# Altium PCB CH32V307V-R0-1v0.PcbDoc (part 1 of 3)
Units mil, origin at the board's own origin, x right, y up, seen from the top; angles counter-clockwise.
Board outline 3661.42 x 3267.72 mil, 2 copper layers (Top Layer, Bottom Layer); 68 components, 119 nets, 417 pads, 746 vias.
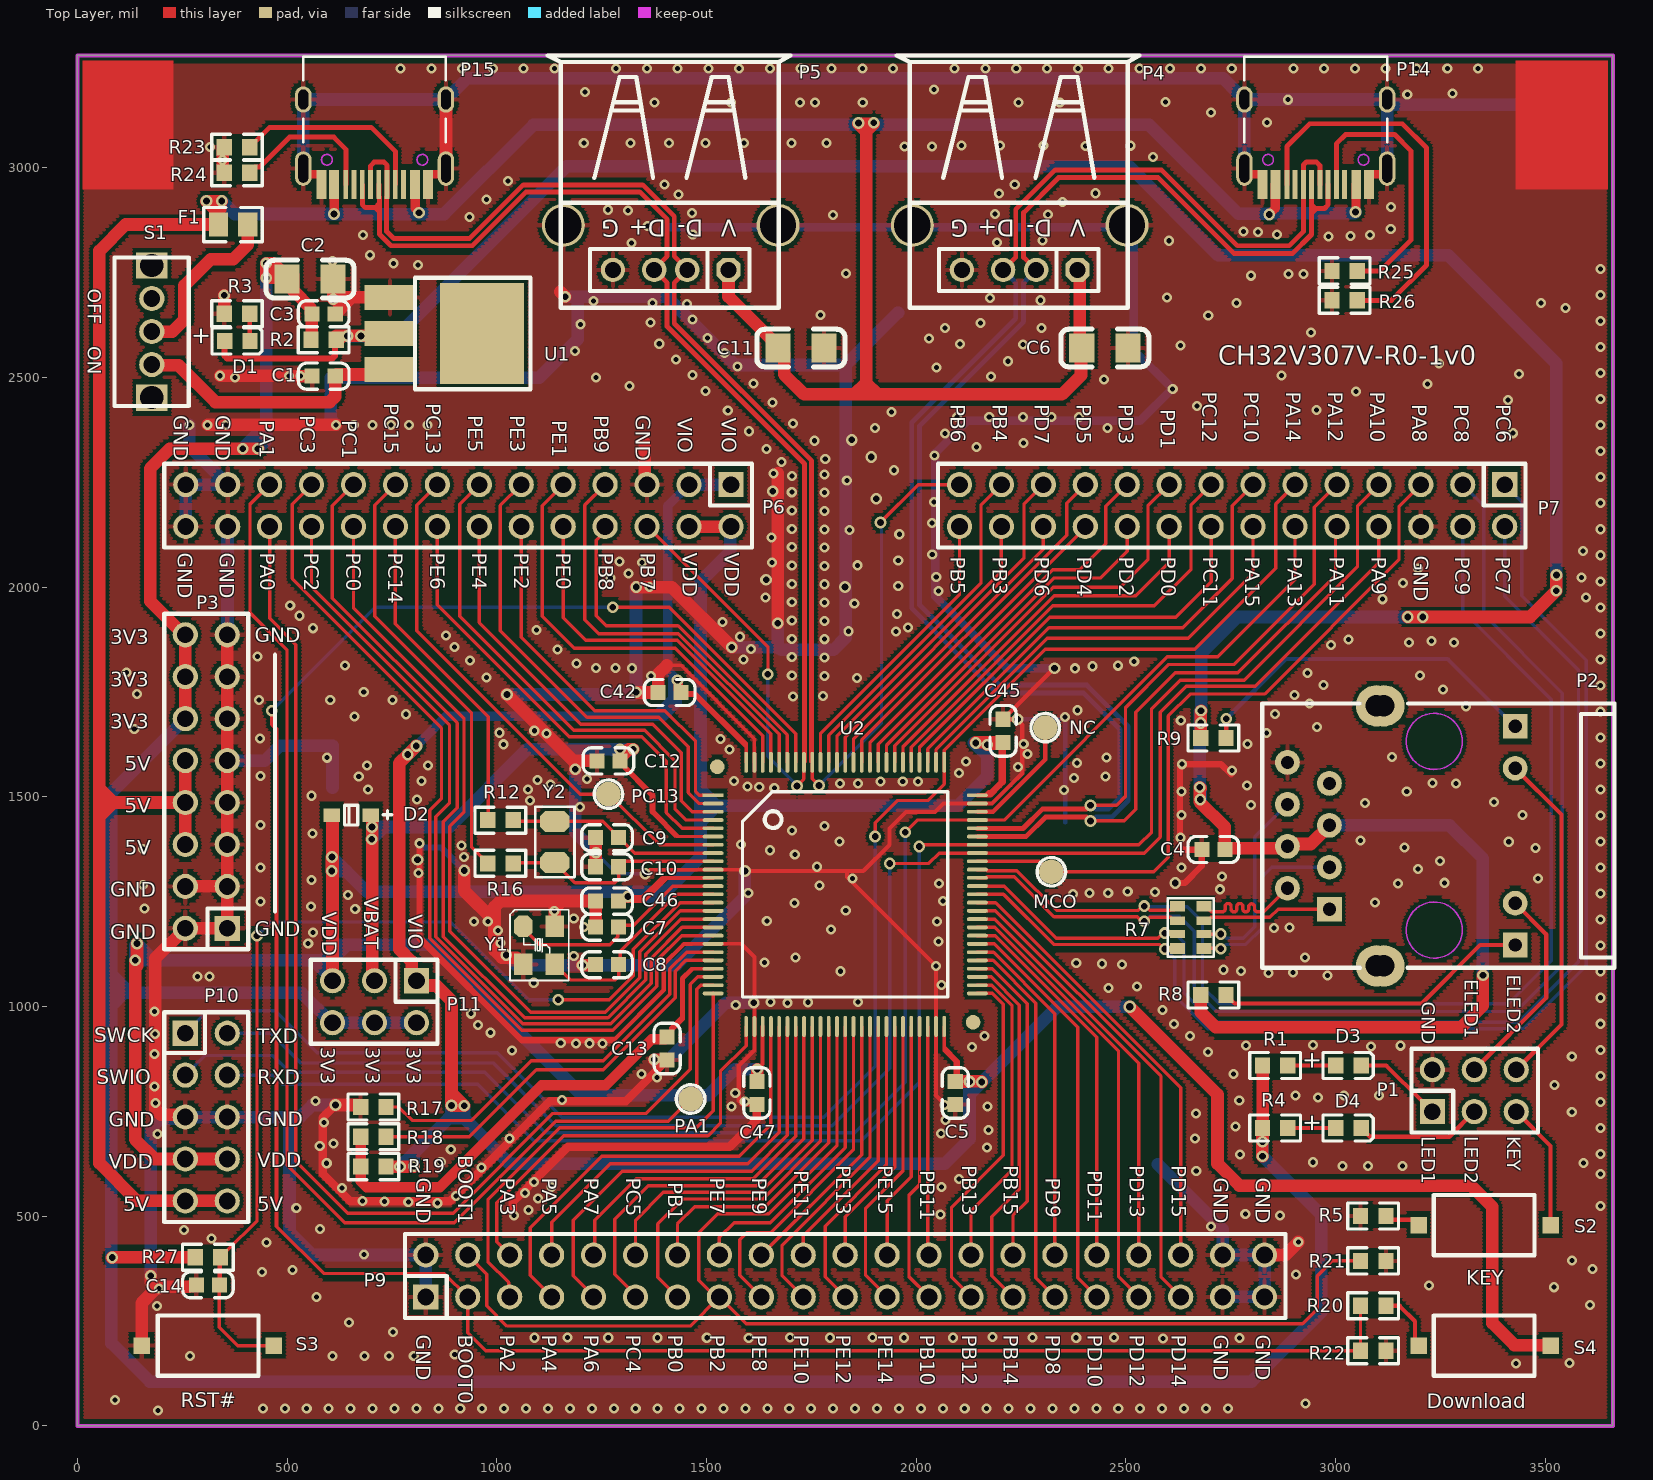
[diagram p0: Top Layer view]
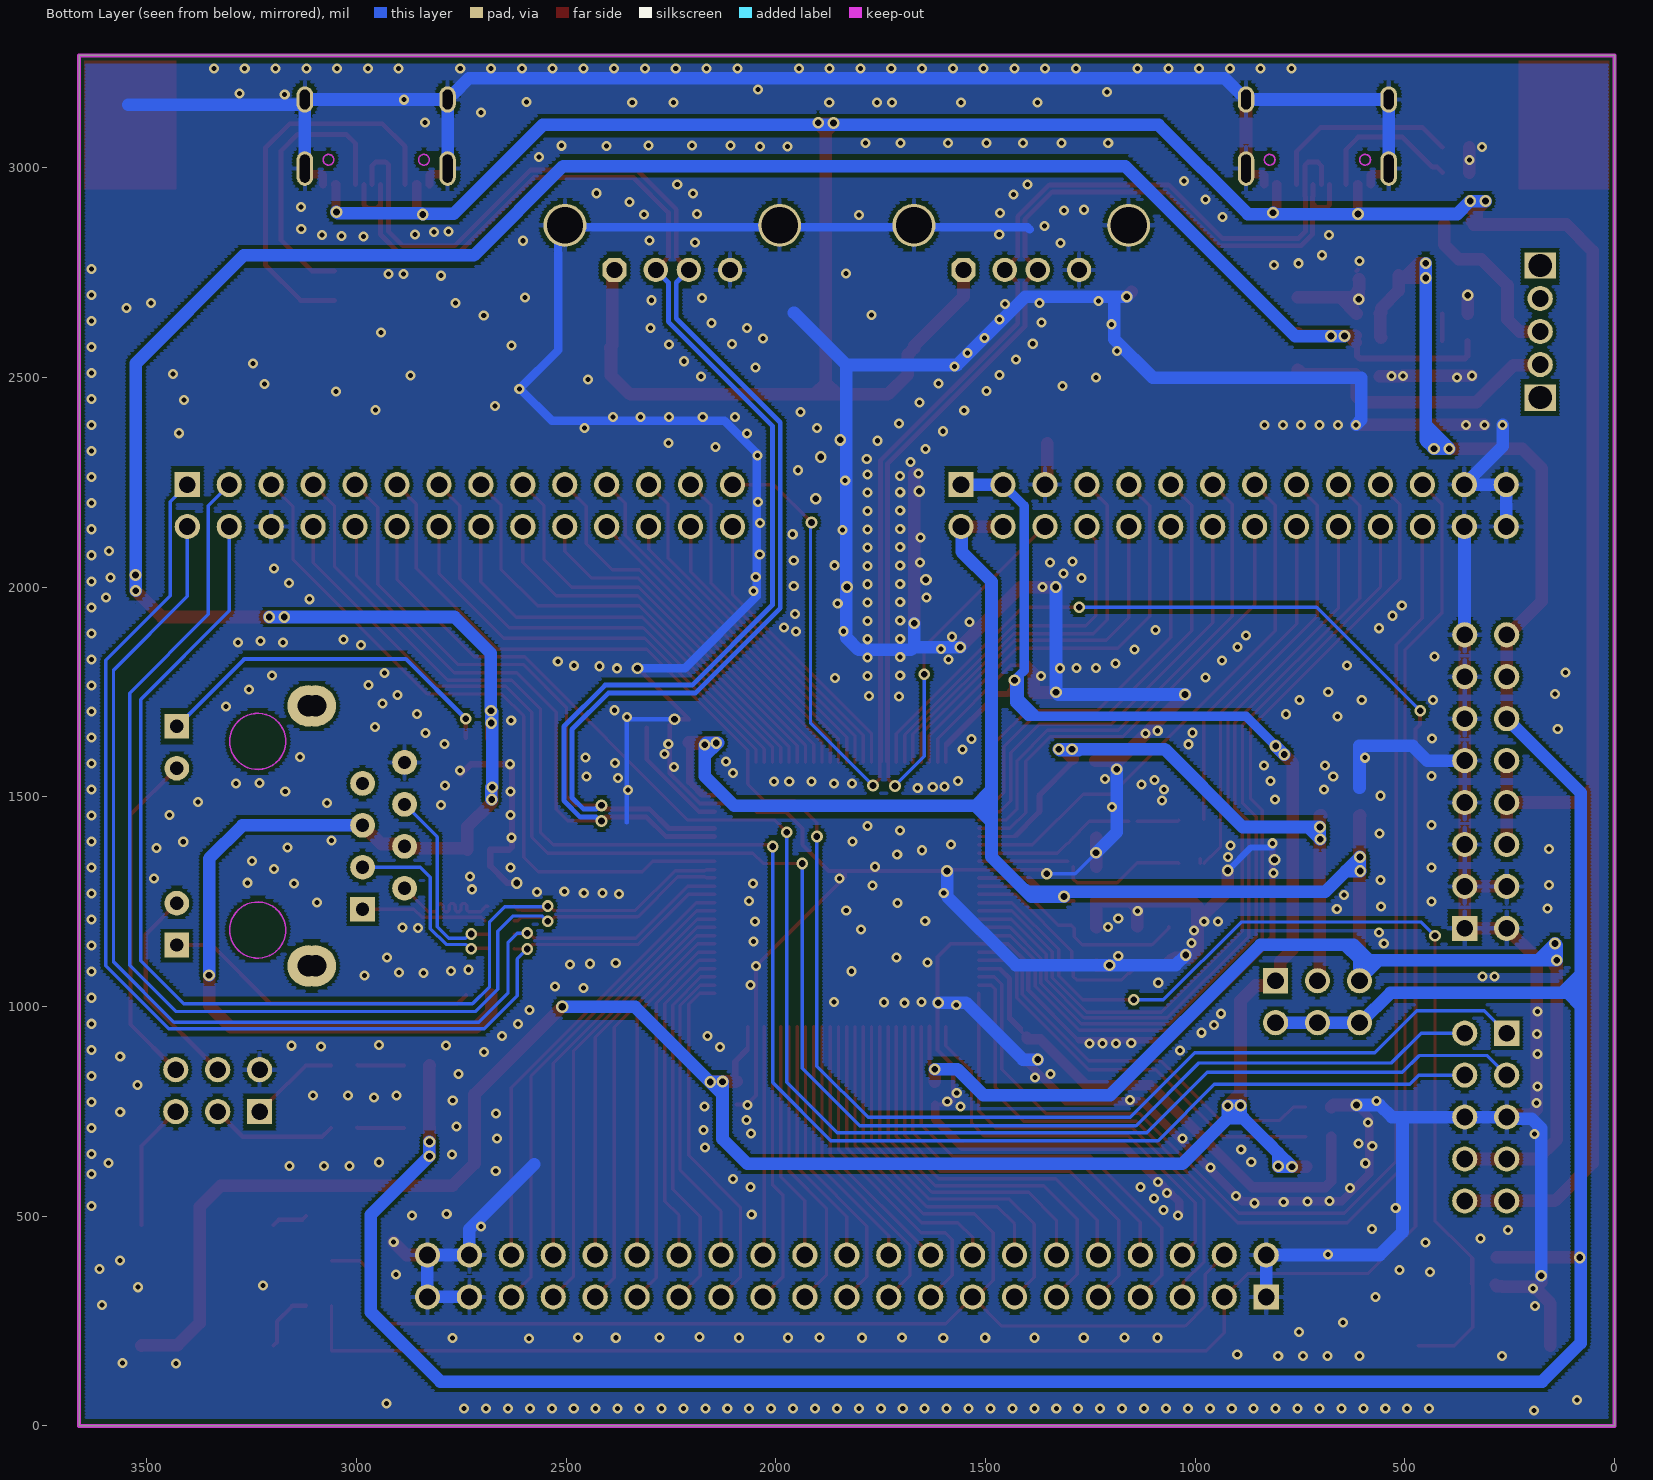
[diagram p1: Bottom Layer view, seen from below]

## Layer stack, top to bottom
Top Solder: solder mask 0.4, Solder Resist, Dk 3.5
Top Layer: signal copper 1.4
Dielectric 1: dielectric 12.6, FR-4, Dk 4.8
Bottom Layer: signal copper 1.4
Bottom Solder: solder mask 0.4, Solder Resist, Dk 3.5

## Board outline
0,0 0,3267.72 3661.42,3267.72 3661.42,0

## Design rules (kind name [scope] priority, off if disabled: settings)
Clearance Clearance_1 [InPolygon] p1: gap=8 ignorepadtopadclearanceinfootprint=FALSE
Clearance [All] p2: gap=5 ignorepadtopadclearanceinfootprint=FALSE
ComponentClearance [All] p1 off: gap=10 collisioncheckmode=3 verticalgap=10 showdistances=FALSE
DiffPairsRouting [All] p1: maxlimit=10 minlimit=5 mostfreqgap=7 toplayer_minwidth=8 toplayer_maxwidth=15 toplayer_prefwidth=8 bottomlayer_minwidth=8 bottomlayer_maxwidth=15 bottomlayer_prefwidth=8 maxuncoupledlength=500
MinimumSolderMaskSliver [All] p1 off: minsoldermaskwidth=10
PolygonConnect PolygonConnect_1 [IsVia] p1: connectstyle=Direct reliefconductorwidth=10 reliefentries=4 polygonreliefangle="90 Angle" airgapwidth=10
PolygonConnect [All] p2: connectstyle=Relief reliefconductorwidth=10 reliefentries=4 polygonreliefangle="90 Angle" airgapwidth=10
RoutingVias [All] p1: holewidth=16 width=28 viastyle="Through Hole" minholewidth=12 minwidth=24 maxholewidth=28 maxwidth=50
SilkToSilkClearance [All] p1 off: silktosilkclearance=10
SilkToSolderMaskClearance [IsPad] p1 off: minsilkscreentomaskgap=10 clearancetoexposedcopper=TRUE
SolderMaskExpansion [All] p1: expansion=4 istentingtop=FALSE
Width [All] p1: maxlimit=100 minlimit=6 preferedwidth=10
25 further rules are at their usual default settings.

## Classes and differential pairs
differential pair ETX: +ETXP -ETXN
differential pair ERX: +ERXP -ERXN
differential pair ERX1: +ERXP1 -ERXN1
differential pair USB1: +PB7 -PB6
differential pair USB2: +PA12 -PA11

## Components (designator, comment, footprint, x,y, rotation, side; value= is the part's Value field where it differs from the comment)
C1 "0.1uF" 0603_C 614.71,2503.21 r180 top
C2 "10uF" 3216_C 499.71,2734.59 r180 top
C3 "0.1uF" 0603_C 559.72,2651.67 r0 top
C4 "1uF" 0603_C 2681.03,1374.36 r0 top
C5 "0.1uF" 0603_C 2093.21,821.36 r270 top
C6 "10uF" 3216_C 2394.73,2570.1 r180 top
C7 "20pF" 0603_C 1235.4,1189.11 r0 top
C8 "20pF" 0603_C 1235.4,1099.73 r0 top
C9 "12pF" 0603_C 1235.4,1402.61 r0 top
C10 "12pF" 0603_C 1235.4,1333.23 r0 top
C11 "10uF" 3216_C 1670.08,2570.1 r180 top
C12 "0.1uF" 0603_C 1238.69,1585.69 r0 top
C13 "0.1uF" 0603_C 1406.03,927.4 r270 top
C14 "0.1uF" 0603_C 283.44,336.36 r0 top
C42 "0.1uF" 0603_C 1384.49,1748.68 r0 top
C45 "0.1uF" 0603_C 2207.3,1629.96 r90 top
C46 "0.1uF" 0603_C 1290.39,1251.48 r180 top
C47 "0.1uF" 0603_C 1620.21,766.37 r90 top
D1 "RED" 0603+ 350.83,2586.93 r0 top
D2 "B0520WS" SOD-323 699.12,1456.36 r180 top
D3 "BLUE" 0603+ 3000.21,859.36 r0 top
D4 "RED" 0603+ 3000.21,710.36 r0 top
F1 "500mA" 0805 336.17,2864.6 r0 top
MCO "Testpoint" TESTPOINT1 2322.21,1321.36 r0 top
NC "Testpoint" TESTPOINT1 2307.69,1664.95 r0 top
P1 "IO" IDC6-2.54mm 3230.77,749.27 r0 top
P2 "HR911105A" HR911105A 2985.22,1231.99 r90 top
P3 "Ppin" IDC16-2.54mm 357.21,1186.36 r180 top
P4 "USBFS" USBAF 2384.59,2756.36 r180 top
P5 "USBHS" USBAF 1552.42,2756.36 r180 top
P6 "HEADER 14x2" IDC28-2.54MM 1558.21,2244.36 r270 top
P7 "HEADER 14x2" IDC28-2.54MM 3403.21,2244.36 r270 top
P9 "HEADER 21x2" IDC42-2.54MM 830.71,307.44 r90 top
P10 "LINK" IDC10-2.54mm 257.21,536.36 r0 top
P11 "Psel" IDC6-2.54mm 808.21,1061.36 r180 top
P14 "USBFS" TYPE-C-Receptacle-2.0 2952.78,2959.96 r180 top
P15 "USBHS" TYPE-C-Receptacle-2.0 708.64,2959.96 r180 top
PA1 "Testpoint" TESTPOINT1 1462.18,779.41 r0 top
PC13 "Testpoint" TESTPOINT1 1266.21,1506.36 r0 top
R1 "1K" 0603 2825.58,859.36 r0 top
R2 "0R" 0603 556.9,2589.82 r0 top
R3 "1K" 0603 410.77,2651.66 r180 top
R4 "1K" 0603 2825.58,710.36 r0 top
R5 "10K" 0603 3059.47,500.58 r0 top
R7 "0Ω" RCA-8P4R-0603 2654.91,1188.5 r270 top
R8 "1K" 0603 2678.21,1027.36 r0 top
R9 "1K" 0603 2678.21,1640.36 r0 top
R12 "NC(0R)" 0603 978.21,1444.36 r0 top
R16 "NC(0R)" 0603 978.21,1341.36 r0 top
R17 "0R" 0603 675.15,760.26 r0 top
R18 "0R" 0603 675.15,689.26 r0 top
R19 "0R" 0603 735.78,618.26 r180 top
R20 "1K" 0603 3059.47,286.28 r0 top value=10K
R21 "10K" 0603 3059.47,393.43 r0 top
R22 "10K" 0603 3059.47,179.13 r0 top
R23 "5.1K" 0603 410.77,3048.82 r180 top
R24 "5.1K" 0603 410.77,2988 r180 top
R25 "5.1K" 0603 3051.97,2754.06 r180 top
R26 "5.1K" 0603 3051.97,2683.9 r180 top
R27 "10K" 0603 341.25,402.06 r180 top
S1 "SW SPDT" KEY_B 177.31,2451.87 r90 top
S2 "KEY" SMD_6.1x3.65x2.5mm-KEY 3512.71,478.75 r180 top
S3 "RST#" SMD_6.1x3.65x2.5mm-KEY 153.21,191.36 r0 top
S4 "Download" SMD_6.1x3.65x2.5mm-KEY 3512.71,191.36 r180 top
U1 "1117-3.3V" SOT-223 744.97,2690.71 r270 top
U2 "CH32V307V" LQFP100 1515.75,1503.62 r270 top
Y1 "8MHz" XT3225 1063.21,1190.91 r270 top
Y2 "32768Hz" FC-135 1138.21,1441.36 r270 top

## Footprints (in the part's own frame and the unit in brackets; to place one, negate y for a bottom-side part, rotate by r counter-clockwise, add the part's x,y. Pads: shape width x height; smd on the part's side, far side on the other; paste and mask are expansions set on the pad)
0603 [mm]
  rect 0.93x0.98 smd: 1(0,0) 2(1.54,0)
  silkscreen extent -0.76,-0.79 2.3,0.79
0603+ [mm]
  rect 0.93x0.98 smd: 1(0,0) 2(1.54,0)
  silkscreen extent -0.76,-0.79 2.27,0.79
0603_C [mil]
  rect 36x36 smd: 1(0,0) 2(55,0)
  silkscreen extent -33,-31 88,31
0805 [mm]
  rect 1.16x1.47 smd: 1(0,0) 2(1.78,0)
  silkscreen extent -0.88,-1.04 2.66,1.03
3216_C [mil]
  rect 60x70 smd: 1(0,0) 2(-110,0)
  silkscreen extent -160,-45 50,45
FC-135 [mil]
  oct 50x70 smd: 1(0,0) 2(98.43,0)
  silkscreen extent -35,-47 133,47
HR911105A [mm]
  rect 1.5x1.5 hole 0.8: 1(0,0) 9(-2.175,-11.252) 12(11.075,-11.252)
  round 1.5 hole 0.8: 2(1.27,2.54) 3(2.54,0) 4(3.81,2.54) 5(5.08,0) 6(6.35,2.54) 7(7.62,0) 8(8.89,2.54) 10(0.365,-11.252) 11(8.535,-11.252)
  round 2.5 hole 1.3: ""(-3.43,-2.852) ""(-3.43,-3.3) ""(12.32,-3.3) ""(12.32,-2.852)
  Keep-Out Layer circle w0.1: c10.165,-6.352 r1.7
  Keep-Out Layer circle w0.1: c-1.265,-6.352 r1.7
  silkscreen extent -3.55,-17.27 12.45,4.06
IDC6-2.54mm [mil]
  rect 60x60 hole 40: 1(0,0)
  round 60 hole 40: 2(0,100) 3(100,0) 4(100,100) 5(200,0) 6(200,100)
  silkscreen extent -50,-50 252,150
IDC10-2.54mm [mil]
  rect 60x60 hole 40: 1(0,400)
  round 60 hole 40: 2(100,400) 3(0,300) 4(100,300) 5(0,200) 6(100,200) 7(0,100) 8(100,100) 9(0,0) 10(100,0)
  silkscreen extent -50,-50 150,450
IDC16-2.54mm [mil]
  rect 60x60 hole 40: 1(0,0)
  round 60 hole 40: 2(100,0) 3(0,-100) 4(100,-100) 5(0,-200) 6(100,-200) 7(0,-300) 8(100,-300) 9(0,-400) 10(100,-400) 11(0,-500) 12(100,-500) 13(0,-600) 14(100,-600) 15(0,-700) 16(100,-700)
  silkscreen extent -50,-750 150,50
IDC28-2.54MM [mil]
  rect 60x60 hole 40: 1(0,0)
  round 60 hole 40: 2(100,0) 3(0,-100) 4(100,-100) 5(0,-200) 6(100,-200) 7(0,-300) 8(100,-300) 9(0,-400) 10(100,-400) 11(0,-500) 12(100,-500) 13(0,-600) 14(100,-600) 15(0,-700) 16(100,-700) 17(0,-800) 18(100,-800) 19(0,-900) 20(100,-900) 21(0,-1000) 22(100,-1000) 23(0,-1100) 24(100,-1100) 25(0,-1200) 26(100,-1200) 27(0,-1300) 28(100,-1300)
  silkscreen extent -50,-1351 150,50
IDC42-2.54MM [mil]
  rect 60x60 hole 40: 1(0,0)
  round 60 hole 40: 2(100,0) 3(0,-100) 4(100,-100) 5(0,-200) 6(100,-200) 7(0,-300) 8(100,-300) 9(0,-400) 10(100,-400) 11(0,-500) 12(100,-500) 13(0,-600) 14(100,-600) 15(0,-700) 16(100,-700) 17(0,-800) 18(100,-800) 19(0,-900) 20(100,-900) 21(0,-1000) 22(100,-1000) 23(0,-1100) 24(100,-1100) 25(0,-1200) 26(100,-1200) 27(0,-1300) 28(100,-1300) 29(0,-1400) 30(100,-1400) 31(0,-1500) 32(100,-1500) 33(0,-1600) 34(100,-1600) 35(0,-1700) 36(100,-1700) 37(0,-1800) 38(100,-1800) 39(0,-1900) 40(100,-1900) 41(0,-2000) 42(100,-2000)
  silkscreen extent -50,-2050 150,50
KEY_B [mm]
  rect 1.6x1.9 hole 1.4: 0(0,0) 0(8,0)
  round 1.524 hole 1.016: 1(4,0) 2(2,0) 3(6,0)
  silkscreen extent -0.52,-2.24 8.48,2.26
LQFP100 [mil]
  round 35 smd: 0(-68,10) 0(541.18,620)
  rect 9x50 smd: 1(0,0)
  oval 9x50 smd: 2(19.68,0) 3(39.37,0) 4(59.05,0) 5(78.74,0) 6(98.42,0) 7(118.11,0) 8(137.79,0) 9(157.48,0) 10(177.16,0) 11(196.85,0) 12(216.53,0) 13(236.22,0) 14(255.9,0) 15(275.59,0) 16(295.27,0) 17(314.96,0) 18(334.64,0) 19(354.33,0) 20(374.01,0) 21(393.7,0) 22(413.38,0) 23(433.07,0) 24(452.75,0) 25(472.44,0) 51(472.44,629.92) 52(452.75,629.92) 53(433.07,629.92) 54(413.38,629.92) 55(393.7,629.92) 56(374.01,629.92) 57(354.33,629.92) 58(334.64,629.92) 59(314.96,629.92) 60(295.27,629.92) 61(275.59,629.92) 62(255.9,629.92) 63(236.22,629.92) 64(216.53,629.92) 65(196.85,629.92) 66(177.16,629.92) 67(157.48,629.92) 68(137.79,629.92) 69(118.11,629.92) 70(98.42,629.92) 71(78.74,629.92) 72(59.05,629.92) 73(39.37,629.92) 74(19.68,629.92) 75(0,629.92)
  oval 50x9 smd: 26(551.18,78.74) 27(551.18,98.43) 28(551.18,118.11) 29(551.18,137.8) 30(551.18,157.48) 31(551.18,177.17) 32(551.18,196.85) 33(551.18,216.54) 34(551.18,236.22) 35(551.18,255.91) 36(551.18,275.59) 37(551.18,295.28) 38(551.18,314.96) 39(551.18,334.65) 40(551.18,354.33) 41(551.18,374.02) 42(551.18,393.7) 43(551.18,413.39) 44(551.18,433.07) 45(551.18,452.76) 46(551.18,472.44) 47(551.18,492.13) 48(551.18,511.81) 49(551.18,531.5) 50(551.18,551.18) 76(-78.74,551.18) 77(-78.74,531.5) 78(-78.74,511.81) 79(-78.74,492.13) 80(-78.74,472.44) 81(-78.74,452.76) 82(-78.74,433.07) 83(-78.74,413.39) 84(-78.74,393.7) 85(-78.74,374.02) 86(-78.74,354.33) 87(-78.74,334.65) 88(-78.74,314.96) 89(-78.74,295.28) 90(-78.74,275.59) 91(-78.74,255.91) 92(-78.74,236.22) 93(-78.74,216.54) 94(-78.74,196.85) 95(-78.74,177.17) 96(-78.74,157.48) 97(-78.74,137.8) 98(-78.74,118.11) 99(-78.74,98.43) 100(-78.74,78.74)
  silkscreen extent -8,70 481,560
RCA-8P4R-0603 [mm]
  rect 0.65x0.9 smd: 1(-1.28,-0.8) 4(1.28,-0.8) 5(1.28,0.8) 8(-1.28,0.8)
  rect 0.5x0.9 smd: 2(-0.4,-0.8) 3(0.4,-0.8) 6(0.4,0.8) 7(-0.4,0.8)
  silkscreen extent -1.78,-1.4 1.78,1.4, body extent -1.6,-0.8 1.6,0.8, height 0.6
SMD_6.1x3.65x2.5mm-KEY [mm]
  rect 1x1 smd: 1(0,0) 2(8,0)
  silkscreen extent 0.98,-1.83 7.08,1.83
SOD-323 [mm]
  rect 1x0.83 smd: 1(0,0) 2(2.36,0)
  silkscreen extent -1.28,-0.6 1.58,0.6
SOT-223 [mil]
  rect 60x120 smd: 1(0,0) 2(86,0) 3(172,0)
  rect 240x200 smd: ""(86,220)
  silkscreen extent -47,60 219,335
TESTPOINT1 [mm]
  round 1.5 smd: 1(0,0)
  silkscreen extent -0.86,-0.86 0.87,0.86
TYPE-C-Receptacle-2.0 [mm]
  oval 1x2.1 hole 0.6 slot 1.7 at 90 deg: 0(-4.32,-0.97) 0(4.32,-0.97)
  oval 1x1.6 hole 0.6 slot 1.2 at 90 deg: 0(-4.32,-5.15) 0(4.32,-5.15)
  rect 0.6x1.75 smd: A1(-3.225,0) A4(-2.45,0) B1(3.225,0) B4(2.45,0)
  rect 0.3x1.75 smd: A5(-1.25,0) A6(-0.25,0) A7(0.25,0) A8(1.25,0) B5(1.75,0) B6(0.75,0) B7(-0.75,0) B8(-1.75,0)
  Keep-Out Layer circle w0.1: c2.89,-1.5 r0.325
  Keep-Out Layer circle w0.1: c-2.89,-1.5 r0.325
  silkscreen extent -4.32,-7.75 4.32,-2.55
USBAF [mm]
  round 2.6 hole 2.2: 0(-3,-2.7) 0(10,-2.7)
  oct 1.473x1.473 hole 0.965: 1(0,0)
  round 1.473 hole 0.965: 2(2.5,0) 3(4.5,0) 4(7,0)
  silkscreen extent -3.75,-12.99 10.95,2.29
XT3225 [mm]
  oct 1.3x1.1 smd: 1(0,0)
  rect 1.3x1.1 smd: 2(2.3,0) 3(2.3,1.9) 4(0,1.9)
  silkscreen extent -1.02,-0.8 3.27,2.74

## Part data
C1 C2 C3 C4 C5 C6 C7 C8 C9 C10 C11 C12 C13 C14 C42 C45 C46 C47: library part CAP, "Capacitor"
D1 D3 D4: library part LED0, "Typical INFRARED GaAs LED", LatestRevisionDate=08-Jul-2005, LatestRevisionNote="Mech Layer 1 removed.", PackageDescription="LED; 2 Leads", PackageReference=LED-0, Published=8-Jun-2000, Publisher="Altium Limited"
D2: library part DIODE, "Diode"
F1: library part FUSE1, "Fuse"
MCO NC PA1 PC13: "测试点"
P1 P11: library part "Header 3X2H", "Header, 3-Pin, Dual row, Right Angle", LatestRevisionDate=17-Jul-2002, LatestRevisionNote="Re-released for DXP Platform.", Publisher="Altium Limited"
P3: library part "Header 8X2H", "Header, 8-Pin, Dual row, Right Angle", LatestRevisionDate=17-Jul-2002, LatestRevisionNote="Re-released for DXP Platform.", Publisher="Altium Limited"
P4 P5: library part USB, "USB Port"
P6 P7: "Header, 14-Pin, Dual row"
P9: "Header, 21-Pin, Dual row"
P10: library part "Header 5X2H", "Header, 5-Pin, Dual row, Right Angle", LatestRevisionDate=17-Jul-2002, LatestRevisionNote="Re-released for DXP Platform.", Publisher="Altium Limited"
P14 P15: library part TYPE-C1
R1 R2 R3 R4 R5 R8 R9 R12 R16: library part RES
R7: library part R-8P4R, "贴片网络排阻", BOM名称=贴片网络排阻, 学习资源=www.ooocke.com, 版权归属=源创客
R17 R18 R19: library part R
R20 R21 R22 R23 R24 R25 R26 R27: library part Res2, "Resistor"
  R20 R21 R22 R27: LatestRevisionDate=17-Jul-2002, LatestRevisionNote="Re-released for DXP Platform.", PackageReference=AXIAL-0.4, Published=8-Jun-2000, Publisher="Altium Limited"
S2 S3 S4: library part KEY1
U2: "RISC-V FPU MCU, 144MHz, USB_480M，USB OTG,1000M Ethernet MAC, 2*CAN"
Y1 Y2: library part XTAL, "Crystal Oscillator", LatestRevisionDate=17-Jul-2002, LatestRevisionNote="Re-released for DXP Platform.", PackageDescription="Crystal, Thru-Hole; 2 Leads; Body 3.1 x 8.2 mm (Dia.xH)", PackageReference=R38, Published=8-Jun-2000, Publisher="Altium Limited"

## Via types
v1: diameter 24, hole 12, Top Layer to Bottom Layer, tented both sides, 648 vias
v2: diameter 28, hole 16, Top Layer to Bottom Layer, tented both sides, 97 vias
v3: diameter 30, hole 18, Top Layer to Bottom Layer, tented both sides, 1 vias

## Nets (pads, with @x,y where several pads share a name; then routed paths per layer and width w, separated by ;. In a path a pad name is that pad's centre, name@x,y a point inside that pad or via, vN(x,y) a via of type N, cw(c..) or ccw(c..) an arc to the next point about the centre after c; other vN are vias at no path point)
3V3: C2.1 C3.1 P3.12 P3.14 P3.16 P11.2 P11.4 P11.6 R1.1 R2.1 R4.1 R27.2 | length 8243.8
  Top Layer w30: v2@82.44,401.29 v2(82.83,401.67) 83.22,402.06 R27.2@280.62,402.06 ; P3.12@257.21,1686.36 P3.14@257.21,1786.36 P3.16@257.21,1886.36 253.57,1886.36 173.21,1966.72 173.21,2282.74 220.61,2330.14 v2(394.05,2330.14) v2(430.45,2330.14) ; R2.1@556.9,2595.24 558.31,2596.65 C3.1@558.31,2651.67 ; C3.1@559.72,2651.67 556.72,2654.67 556.72,2664.74 514.71,2706.76 514.71,2744.1 507.93,2737.32 C2.1@501.98,2737.32 ; R4.1@2825.58,710.36 2825.58,643.45 v2(2825.96,643.07) ; R1.1@2825.58,859.36 2825.96,858.98 v2(2825.96,677.55) ; 450.18,2757.89 C2.1@481.41,2757.89 ; 450.18,2757.89 v2(450.18,2772.54) 466.76,2772.54 C2.1@481.41,2757.89 ; 450.18,2757.89 450.18,2737.39 v2(450.1,2737.32) C2.1@501.98,2737.32 ; C2.1@481.41,2757.89 C2.1@501.98,2737.32
  Bottom Layer w30: 119.54,1032.34 124.99,1032.34 ; P3.12@257.21,1686.36 80.94,1510.09 80.94,1076.39 ; v2(450.1,2737.32) v2@450.18,2737.39 ; 450.18,2426.39 450.18,2386.27 ; v2(450.18,2772.54) v2@450.18,2737.39 ; P11.2@808.21,961.36 P11.4@708.21,961.36 P11.6@608.21,961.36 605.59,961.36 534.61,1032.34 124.99,1032.34 ; v2(2825.96,677.55) v2(2825.96,643.07) 2965.37,503.67 2965.37,270.92 2799.98,105.53 172.78,105.53 80.94,197.36 80.94,1001.74 ; 80.94,1001.74 111.54,1032.34 87.67,1032.34 80.94,1039.07 ; 80.94,1001.74 80.94,1039.07 ; 80.94,1039.07 80.94,1076.39 ; 80.94,1076.39 124.99,1032.34 ; v2@434.44,2334.13 450.18,2349.87 450.18,2386.27 ; v2@434.44,2334.13 434.44,2370.53 ; v2@434.44,2334.13 v2(430.45,2330.14) v2(394.05,2330.14) 434.44,2370.53 ; 434.44,2370.53 450.18,2386.27 ; 450.18,2386.27 v2@450.18,2737.39
3V3S: C4.2 D1.1 P2.4 P2.5 R2.2 R8.1 R9.1 U1.2 | length 7702.8
  Top Layer w15: D1.1@350.83,2586.93 350.83,2551.77 357.42,2545.17 607.37,2545.17 613.96,2551.77 613.96,2586.25 R2.2@617.53,2589.82
  Top Layer w30: R2.2@617.53,2583.72 R2.2@633.34,2599.53 ; R2.2@617.6,2599.53 749.79,2599.53 U1.2@754.97,2604.71 ; R8.1@2678.21,1027.36 2678.21,986.5 2714.46,950.25 3299.11,950.25 3351.28,1002.43 v2(3351.28,1074.7) ; v2@2678.21,1520.45 v2(2675.88,1522.78) 2675.88,1488.09 2736.03,1427.94 2736.03,1377.17 C4.2@2737.44,1375.76 ; v2(2678.43,1675.92) 2678.43,1640.58 R9.1@2678.21,1640.36 2678.21,1704.2 v2(2679.34,1705.33) ; C4.2@2736.03,1374.36 C4.2@2737.44,1375.76 ; P2.5@2985.22,1431.99 2940.78,1387.55 2890.78,1387.55 P2.4@2885.22,1381.99 2880.59,1377.36 2739.03,1377.36 C4.2@2737.44,1375.76 ; v2(3172.22,1928.7) 3172.33,1928.81 v2(3207.99,1928.81) 3463.62,1928.81 v2(3526.06,1991.24) 3526.56,1991.74 v2(3526.56,2028.8)
  Bottom Layer w30: v2(644.16,2598.65) 675.97,2598.65 761.88,2598.65 1166.91,3003.68 2507.19,3003.68 2719.76,2791.11 3268.76,2791.11 3526.06,2533.81 3526.06,2028.8 v2(3526.06,1991.24) ; v2(2675.88,1522.78) 2675.88,1702.77 2678.43,1705.33 v2(2678.43,1675.92) ; v2(2677.44,1493.83) 2678.43,1494.82 v2@2678.43,1522.78 ; v2(2679.34,1705.33) 2679.34,1842.03 2766.12,1928.81 v2(3207.99,1928.81) ; P2.5@2985.22,1431.99 3271.87,1431.99 3351.28,1352.58 3351.28,1079.77 v2(3351.28,1074.7)
  other v2: 675.97,2598.71
5V: C6.1 C11.1 F1.1 P3.6 P3.8 P3.10 P4.1 P5.1 P10.9 P10.10 P14.A4 P14.B4 P15.A4 P15.B4 | length 8780.7
  Top Layer w22: v2(611.88,2889.69) 612.19,2890 P15.B4@612.19,2959.96 P15.B4@612.49,2960.27 ; P15.A4@805.41,2960.27 805.41,2903.19 814.2,2894.4 v2(814.2,2892.78) ; v2(2841.64,2888.68) 2841.64,2888.83 2856.32,2903.51 P14.B4@2856.32,2959.96 ; v2(3047.72,2894.55) 3048.48,2895.3 3048.48,2959.2 P14.A4@3049.23,2959.96
  Top Layer w30: P3.6@257.21,1386.36 P3.8@257.21,1486.36 ; P3.10@257.21,1586.36 P3.8@257.21,1486.36 ; F1.1@336.17,2864.6 F1.1@334.12,2866.65 ; F1.1@339.9,2872.43 F1.1@334.12,2866.65 ; 339.9,2900.19 339.9,2916.27 v2(344.23,2920.6) v2(307.71,2920.6) 328.12,2900.19 328.12,2884.38 328.33,2884.17 328.33,2872.43 F1.1@334.12,2866.65 ; P10.10@357.21,536.36 P10.9@257.21,536.36 142.44,536.36 52.11,626.68 52.11,1453.05 ; P5.1@1552.42,2756.36 1552.42,2692.76 1670.08,2575.1 C11.1@1670.08,2570.1 1685.08,2555.1 1685.08,2507.5 1732.68,2459.9 1853.5,2459.9 ; v2@1898.89,3105.16 v2@1898.18,3104.45 ; 1907.5,2459.49 2347.34,2459.49 2392.94,2505.1 C6.1@2392.94,2571.88 ; P4.1@2384.59,2756.36 2389.66,2751.29 2389.66,2575.17 C6.1@2392.94,2571.88 ; C6.1@2394.73,2570.1 C6.1@2392.94,2571.88 ; 52.11,1453.05 52.11,1486.36 ; 52.11,1453.05 85.43,1486.36 ; 52.11,1486.36 52.11,1519.67 ; 52.11,1486.36 85.43,1486.36 ; 52.11,1519.67 52.11,2801.69 115.02,2864.6 332.07,2864.6 F1.1@334.12,2866.65 ; 52.11,1519.67 85.43,1486.36 ; 85.43,1486.36 P3.8@257.21,1486.36 ; 1853.5,2459.9 1880.5,2459.9 ; 1853.5,2459.9 1880.5,2486.9 ; 1880.5,2459.9 1907.5,2459.9 1880.5,2486.9 ; 1880.5,2459.9 1880.5,2486.9 ; 1880.5,2486.9 1880.5,3086.38 ; 1880.5,3086.38 1862.43,3104.45 v2@1898.18,3104.45 ; 1880.5,3086.38 1880.5,3086.77 v2@1898.18,3104.45
  Bottom Layer w30: v2(307.71,2920.6) v2(344.23,2920.6) 375.13,2889.69 v2(611.88,2889.69) ; v2@611.88,2889.38 v2@817.59,2889.38 ; v2(814.2,2892.78) v2@817.59,2889.38 ; v2(3047.72,2894.55) 3044.62,2891.44 2844.4,2891.44 v2(2841.64,2888.68) 2840.26,2890.06 2768.06,2890.06 2555.69,3102.43 1898.89,3102.43 1862.43,3102.43 1087.31,3102.43 874.26,2889.38 v2@817.59,2889.38
  other v2: 1862.43,3106.45 1898.89,3107.16
BOOT0: P9.3 R20.1 R22.1 U2.94 | length 5642.6
  Top Layer w8: 474.62,476.52 587.95,363.18 874.96,363.18 P9.3@930.71,307.44 930.71,222.15 973.73,179.13 R22.1@3059.47,179.13 R20.1@3059.47,286.28 ; v2(1276.44,1951.92) 1411.5,1951.92 1712.6,1650.83 U2.94@1712.6,1582.36
  Top Layer w10: v2(463.62,1704.96) 463.62,1672.83 474.62,1661.83 474.62,476.52
  Bottom Layer w8: v2(463.62,1704.96) 710.58,1951.92 v2(1276.44,1951.92)
BOOT1: P9.4 P9.15 R21.1 U2.37 | length 3285.4
  Top Layer w8: P9.4@930.71,407.44 976.2,361.95 976.2,286.06 1024.23,238.03 1461.3,238.03 P9.15@1530.71,307.44 ; U2.37@1811.02,952.44 1811.02,668.2 1648.33,505.5 1526.57,505.5 1481.64,460.57 1481.64,346.9 1521.1,307.44 P9.15@1530.71,307.44 ; R21.1@3059.47,393.43 2991.94,393.43 2955.89,357.37 2955.89,278.55 2921.16,243.83 1594.32,243.83 P9.15@1530.71,307.44
ELED1: P1.4 P2.10 | length 498.7
  Top Layer w10: P1.4@3330.77,849.27 3502.21,1020.72 3502.21,1172.36 P2.10@3428.21,1246.36
ELED2: P1.6 P2.11 | length 954.4
  Top Layer w10: P2.11@3428.21,1568.01 3538.74,1457.49 3538.74,957.24 ; P1.6@3430.77,849.27 3538.74,957.24 ; 3538.74,1102.4 3538.74,957.24
ERXN: P7.2 R7.3 U2.64 | length 2846.9
  Top Layer w8: U2.64@2145.67,1287.08 2209.9,1287.08 2334.05,1162.93 2576.38,1162.93 2586.21,1172.75 R7.3@2623.41,1172.75
  Bottom Layer w8: v2@2594.51,1175.01 2616.93,1175.01 2638.46,1153.48 2638.46,1032.46 2708.2,962.72 3435.04,962.72 3579.26,1106.94 3579.26,1802.18 3403.21,1978.24 P7.2@3403.21,2144.36
  other v2: 2592.81,1175.01
ERXN1: P2.6 R7.6 | length 460.3
  Top Layer w8: R7.6@2686.41,1172.75 2687.23,1171.93 v2@2726.37,1171.93
  Bottom Layer w8: v2@2726.37,1171.93 2730.88,1171.93 2739.88,1162.93 2779.97,1162.93 2807.49,1190.44 2807.49,1404.26 P2.6@2885.22,1481.99
  other v2: 2726.37,1172.93
ERXP: P7.1 R7.4 U2.63 | length 2957.4
  Top Layer w8: U2.63@2145.67,1267.4 2208.16,1267.4 2327.63,1147.93 2579.29,1147.93 2587.25,1139.97 2599.23,1139.97 2602.05,1137.16 2622.47,1137.16 R7.4@2623.41,1138.1
  Bottom Layer w8: v2(2592.81,1137.16) 2616.65,1113.32 2616.65,1025.27 2695.12,946.8 3447.34,946.8 3597.64,1097.11 3597.64,1825.66 3443.95,1979.35 3443.95,2203.62 P7.1@3403.21,2244.36
ERXP1: P2.3 R7.5 | length 451.1
  Top Layer w8: R7.5@2686.41,1138.1 2687.23,1138.93 v2@2726.37,1138.93
  Bottom Layer w8: v2@2726.37,1138.93 2730.88,1138.93 2739.88,1147.93 2786.19,1147.93 2823.75,1185.49 2823.75,1308.33 2847.41,1331.99 P2.3@2985.22,1331.99
  other v2: 2726.37,1137.93
ETXN: P7.4 R7.1 U2.66 | length 2854.2
  Top Layer w8: U2.66@2145.67,1326.45 2166.44,1326.45 2168.78,1324.11 2239.6,1324.11 2334.64,1229.07 2530.02,1229.07 2540.33,1239.38 2547.2,1239.38 2557.05,1229.53 2606.18,1229.53 2606.75,1230.1 2614.62,1230.1 R7.1@2623.41,1238.89
  Bottom Layer w8: v2(2543.53,1239.38) 2544.64,1238.27 2646.31,1238.27 2682.57,1202.01 2682.57,1046.8 2723.2,1006.16 3411.42,1006.16 3514.55,1109.3 3514.55,1732.04 3303.21,1943.39 P7.4@3303.21,2144.36
ETXN1: P2.2 R7.8 | length 310.2
  Top Layer w8: R7.8@2686.41,1238.89 2691.33,1238.89 2700.12,1230.1 2700.12,1229.26 2703.64,1225.74 2725.75,1225.74 2729.75,1225.74 ccw(c2729.75,1232.74) 2736.75,1232.74 2736.75,1238.74 cw(c2743.75,1238.74) 2750.75,1238.74 2750.75,1232.7 ccw(c2757.75,1232.7) 2764.75,1232.7 2764.75,1238.74 cw(c2771.75,1238.74) 2778.75,1238.74 2778.75,1232.7 ccw(c2785.75,1232.7) 2792.75,1232.7 2792.75,1237.76 cw(c2799.75,1237.76) 2806.75,1237.76 2806.75,1232.74 ccw(c2813.75,1232.74) 2813.75,1225.74 2828.97,1225.74 P2.2@2885.22,1281.99
ETXP: P7.3 R7.2 U2.65 | length 2998.6
  Top Layer w8: U2.65@2145.67,1306.77 2166.44,1306.77 2168.78,1309.11 2233.39,1309.11 2328.43,1214.07 2527.31,1214.07 2538.34,1203.04 2547.09,1203.04 2557.26,1213.21 2606.57,1213.21 2615.54,1204.25 R7.2@2623.41,1204.25
  Bottom Layer w8: v2(2543.75,1203.04) 2544.59,1203.04 2557.24,1215.7 2626.93,1215.7 2663.07,1179.56 2663.07,1040.92 2715.87,988.12 3430.94,988.12 3540.71,1097.89 3540.71,1747.17 3353.11,1934.77 3353.11,2194.46 P7.3@3303.21,2244.36
ETXP1: P2.1 R7.7 | length 302.4
  Top Layer w8: R7.7@2694.28,1204.25 2702.73,1212.7 2843.45,1212.7 2862.74,1231.99 P2.1@2985.22,1231.99